# Altium PCB Countinuity_tester.PcbDoc
Units mil, origin at the board's own origin, x right, y up, seen from the top; angles counter-clockwise.
Board outline 1215 x 990 mil, 2 copper layers (Top Layer, Bottom Layer); 11 components, 105 nets, 17 pads, 0 vias.
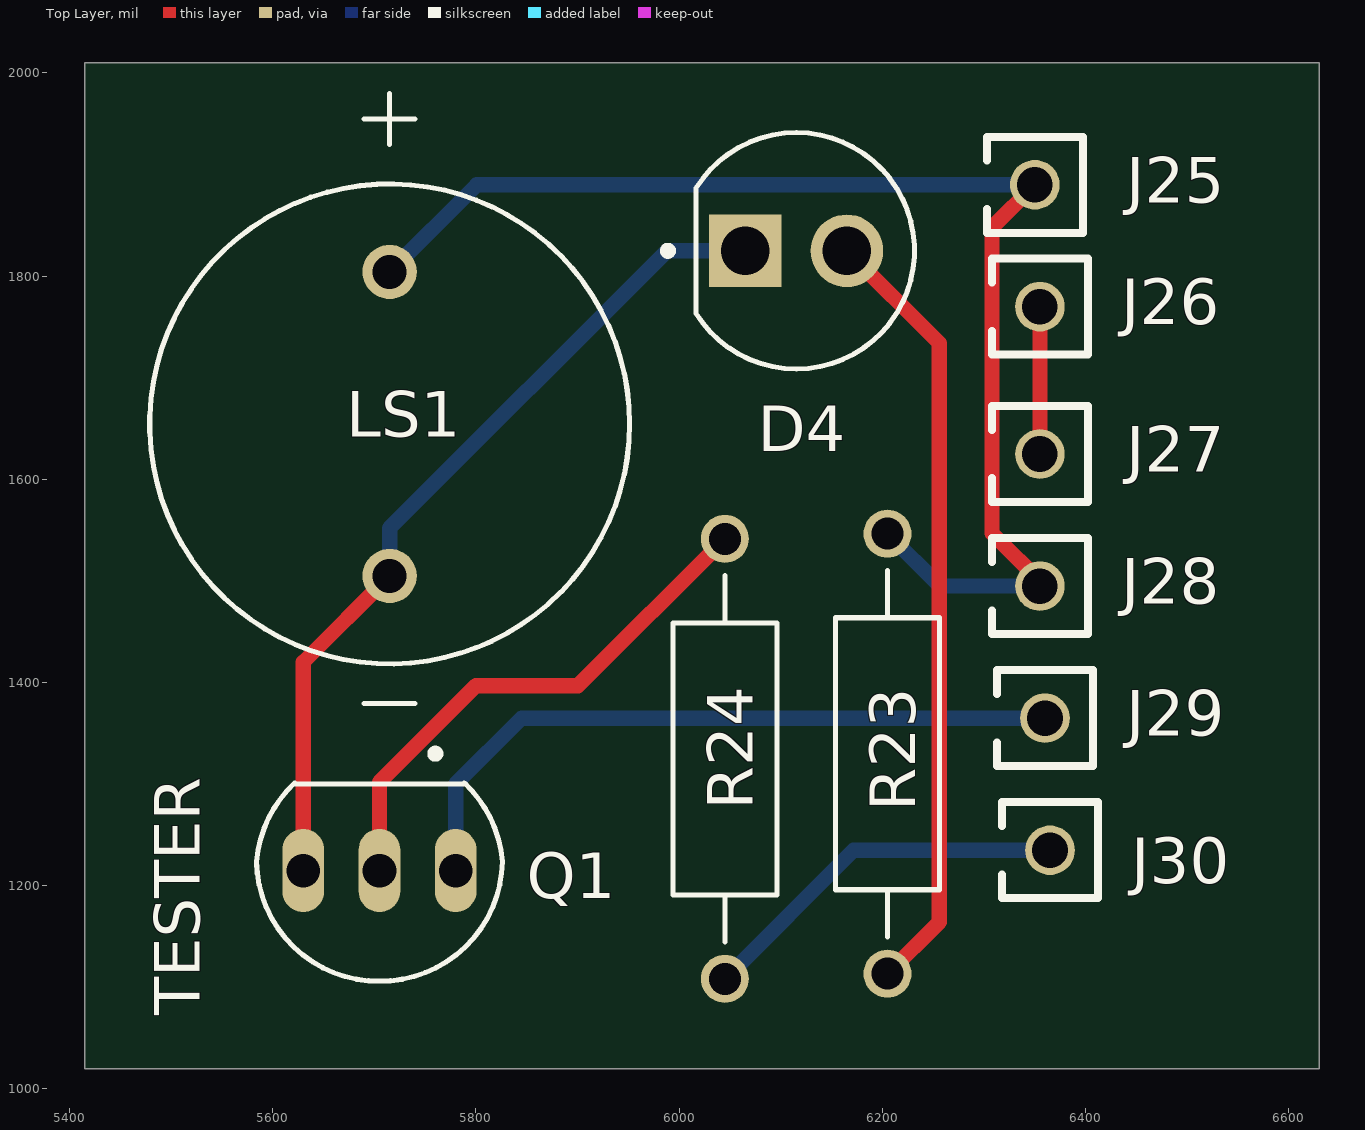
[diagram p0: Top Layer view]
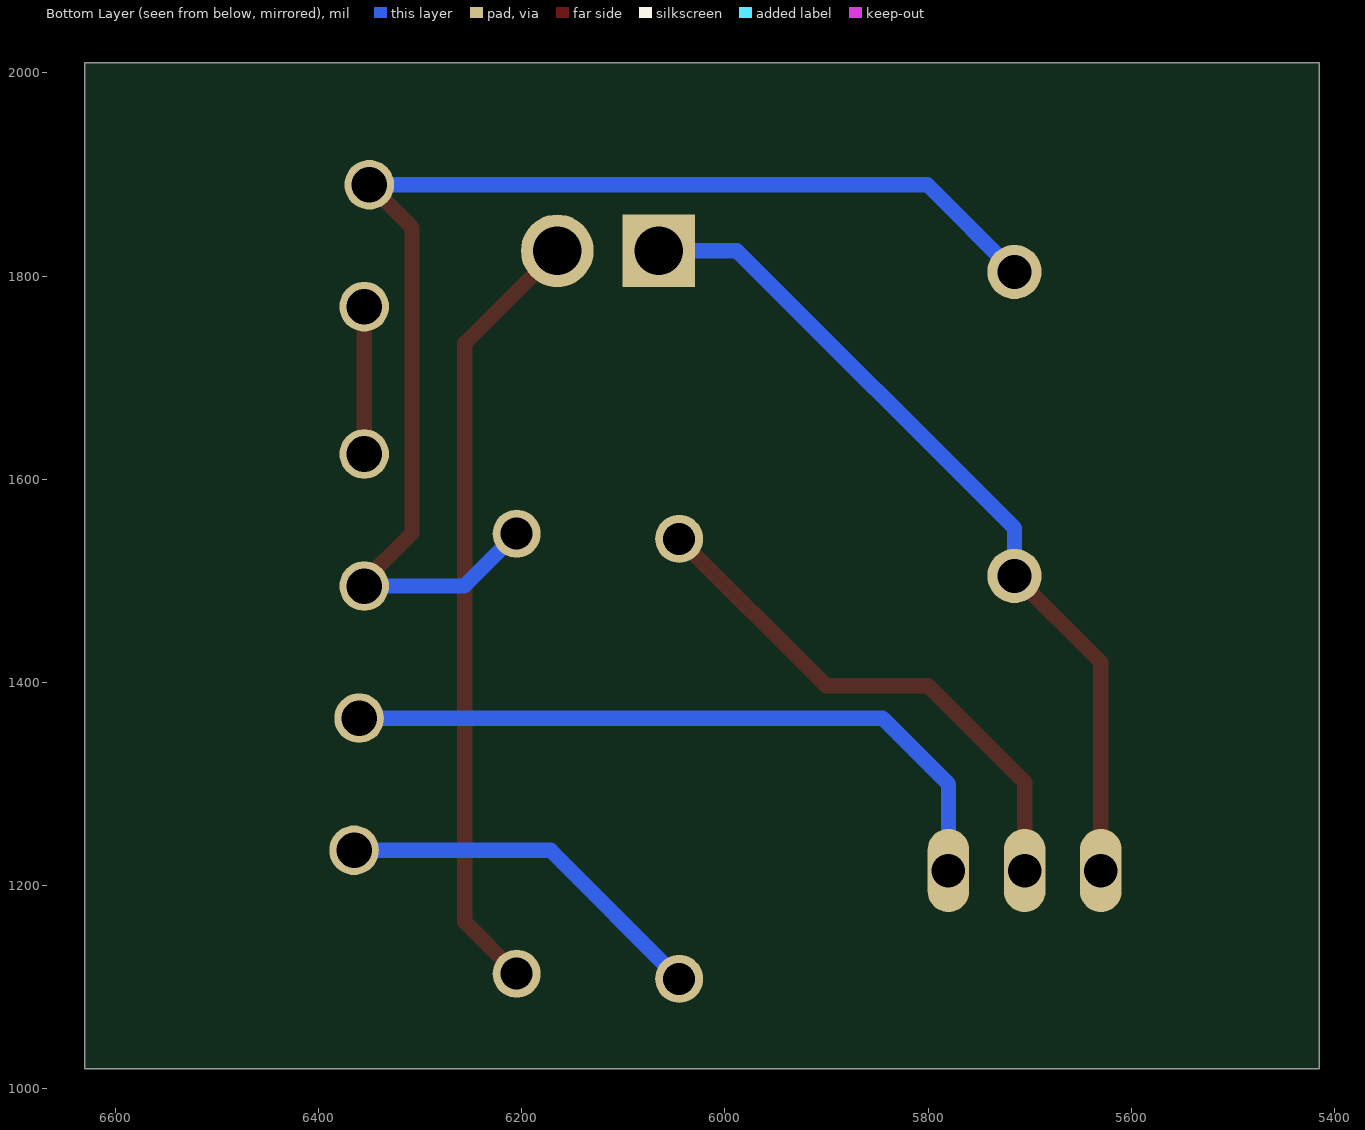
[diagram p1: Bottom Layer view, seen from below]
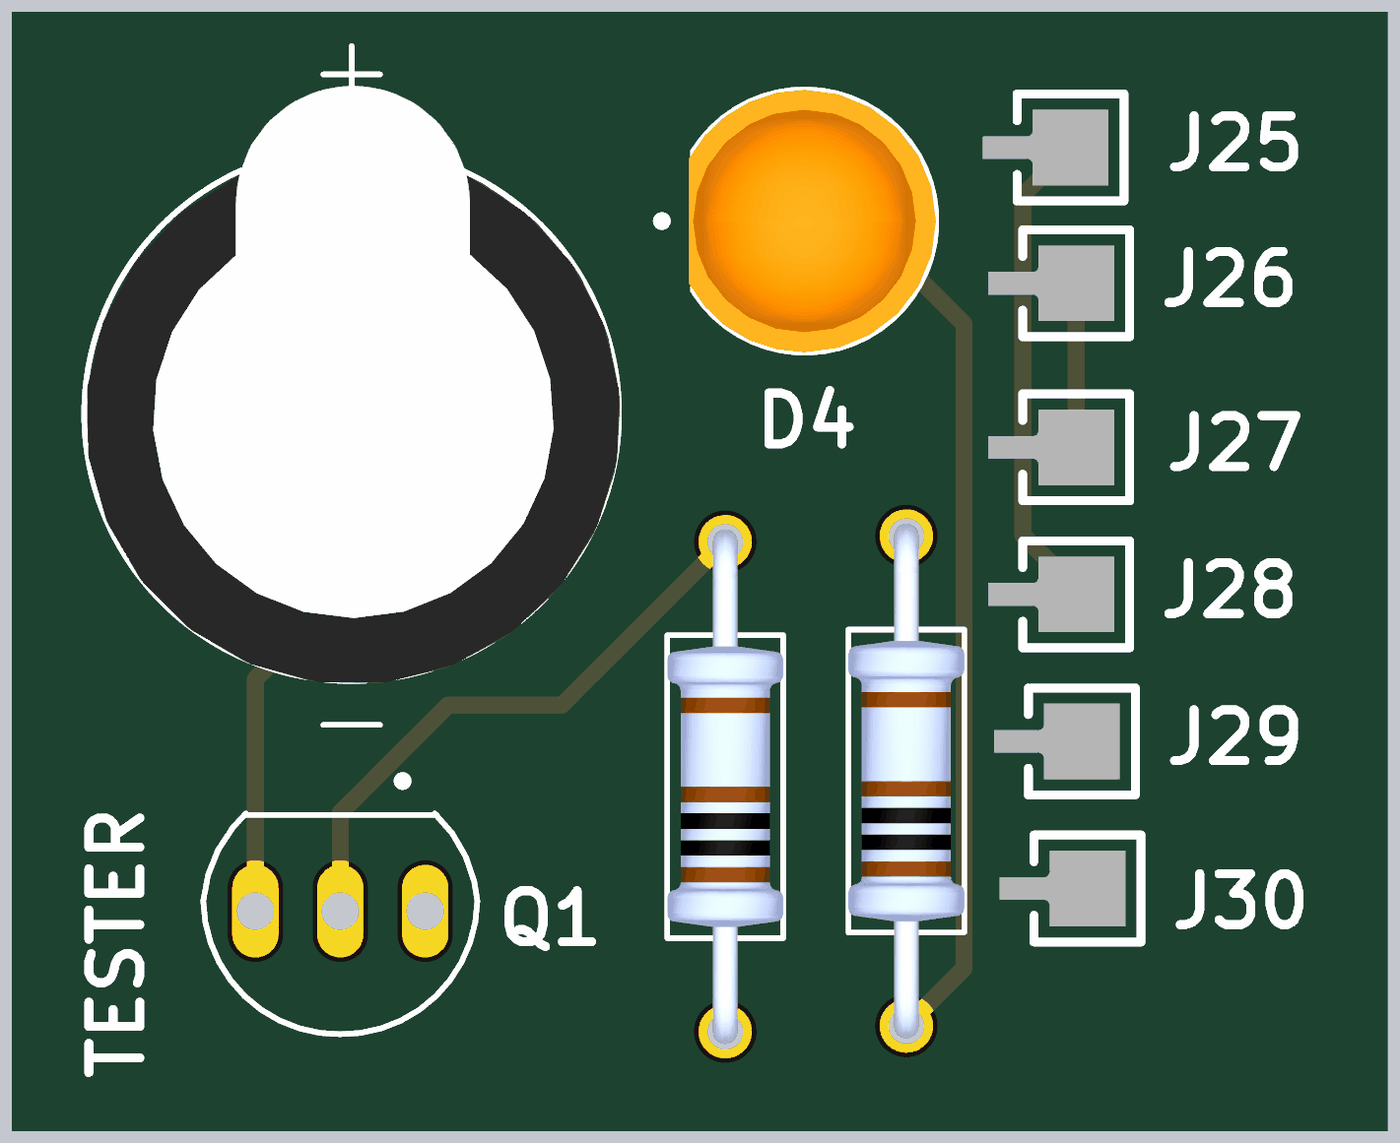
[diagram p2: 3D render of the assembled board from above, using the file's embedded part models]

## Layer stack, top to bottom
Top Solder: solder mask 0.4, Solder Resist, Dk 3.5
Top Layer: signal copper 1.4
Dielectric 1: dielectric 12.6, FR-4, Dk 4.8
Bottom Layer: signal copper 1.4
Bottom Solder: solder mask 0.4, Solder Resist, Dk 3.5

## Board outline
5415,1020 6630,1020 6630,2010 5415,2010

## Design rules (kind name [scope] priority, off if disabled: settings)
Clearance [All] p1: gap=19.68 ignorepadtopadclearanceinfootprint=FALSE except(15: Arc-Arc Arc-Track Arc-SMDPad Arc-THPad Arc-Via Arc-Fill Arc-Poly Arc-Region Arc-Text Track-Track Track-SMDPad Track-THPad Track-Via Track-Fill Track-Poly Track-Region Track-Text; 20: Arc-Hole Track-Hole SMDPad-Hole THPad-Hole Via-Hole Fill-Hole Poly-Hole Region-Hole Text-Hole)
HoleToHoleClearance [All] p1: gap=19.68 allowstackedmicrovias=TRUE
MinimumSolderMaskSliver [All] p1: minsoldermaskwidth=15
PolygonConnect [All] p1: connectstyle=Relief reliefconductorwidth=10 reliefentries=4 polygonreliefangle="90 Angle" airgapwidth=10
RoutingVias [All] p1: holewidth=28 width=50 viastyle="Through Hole" minholewidth=28 minwidth=50 maxholewidth=28 maxwidth=50
SilkToSilkClearance [All] p1: silktosilkclearance=15
SolderMaskExpansion [All] p1: expansion=4 istentingtop=FALSE
Width [All] p1: maxlimit=20 minlimit=10 preferedwidth=15
27 further rules are at their usual default settings.

## Classes and differential pairs
component class Sheet2: C8 C9 R19 U2
component class Sheet1: C1 C2 R8 U1

## Components (designator, comment, footprint, x,y, rotation, side; value= is the part's Value field where it differs from the comment)
D4 "L08R5000Q1" LEDRD254W57D500H1070 6115,1825 r0 top
J25 "P1" SAMTEC_MTMM-101-XX-X-S-XXX 6350,1890 r90 top
J26 "VCC" SAMTEC_MTMM-101-XX-X-S-XXX 6355,1770 r90 top
J27 "SW1" SAMTEC_MTMM-101-XX-X-S-XXX 6355,1625 r90 top
J28 "SW2" SAMTEC_MTMM-101-XX-X-S-XXX 6355,1495 r90 top
J29 "GND" SAMTEC_MTMM-101-XX-X-S-XXX 6360,1365 r90 top
J30 "P2" SAMTEC_MTMM-101-XX-X-S-XXX 6365,1235 r90 top
LS1 "AI-1223-TWT-12V-R" XDCR_AI-1223-TWT-12V-R 5715,1654.61 r0 top
Q1 "2N3904" TO92127P495H495-3 5705,1215 r180 top
R23 "150" RESAD1100W55L680D260 6205,1330 r90 top
R24 "4.7K" RESAD1100W55L680D260 6045,1325 r90 top

## Footprints (in the part's own frame and the unit in brackets; to place one, negate y for a bottom-side part, rotate by r counter-clockwise, add the part's x,y. Pads: shape width x height; smd on the part's side, far side on the other; paste and mask are expansions set on the pad)
LEDRD254W57D500H1070 [mm]
  round 1.815 hole 1.21: A(1.27,0)
  rect 1.815x1.815 / inner round 1.815 / far side rect 1.815x1.815 hole 1.21: C(-1.27,0)
  silkscreen extent -3.3,-2.96 2.96,2.96, body extent -2.6,-2.95 2.95,2.95, height 9.1
RESAD1100W55L680D260 [mm]
  round 1.2 hole 0.8: 1(-5.5,0) 2(5.5,0)
  silkscreen extent -4.58,-1.3 4.58,1.3, body extent -5.77,-1.3 5.77,1.3, height 2.6
SAMTEC_MTMM-101-XX-X-S-XXX [mm]
  round 1.24 hole 0.89: 01(0,0)
  silkscreen extent -1.2,-1.2 1.2,1.2
TO92127P495H495-3 [mm]
  oval 1.04x2.08 hole 0.84: 1(-1.905,0) 2(0,0) 3(1.905,0)
  silkscreen extent -3.08,-3.02 3.08,2.77
XDCR_AI-1223-TWT-12V-R [mm]
  round 1.358 hole 0.85: N(0,-3.8) P(0,3.8)
  silkscreen extent -6,-6.99 6,8.25, body extent -5.97,-6.07 6.03,7.37, height 10.21

## Part data
D4: "LED, 5MM, ORANGE; LED / Lamp Size: 5mm / T-1 3/4; LED Colour: Orange; Typ Luminous Intensity: 4.3mcd; Viewing Angle: ...", Package=None, Availability="In Stock", Check_prices=https://www.snapeda.com/parts/L08R5000Q1/LED+Technology/view-part/?ref=eda, MF="LED Technology", MP=L08R5000Q1, Price=None, SnapEDA_Link=https://www.snapeda.com/parts/L08R5000Q1/LED+Technology/view-part/?ref=snap
J25 J26 J27 J28 J29 J30: library part MTMM-101-XX-X-S-XXX, "Connector Header position", Package=None, Availability=Unavailable, MP=MTMM-101-XX-X-S-XXX, Price=None
LS1: "ELECTRO-MECHANICAL AUDIO INDICATOR", Package=None, Availability="In Stock", Check_prices=https://www.snapeda.com/parts/AI-1223-TWT-12V-R/PUI+Audio%252C+Inc./view-part/?ref=eda, MF="PUI Audio,", MP=AI-1223-TWT-12V-R, Price=None, Purchase-URL=https://pricing.snapeda.com/search/part/AI-1223-TWT-12V-R/?ref=eda, SnapEDA_Link=https://www.snapeda.com/parts/AI-1223-TWT-12V-R/PUI+Audio%252C+Inc./view-part/?ref=snap
Q1: "TRANS NPN 40V 200MA TO92-3", Package="TO-226-3 Rectron", Availability="In Stock", Check_prices=https://www.snapeda.com/parts/2N3904/Rectron/view-part/?ref=eda, MF=Rectron, MP=2N3904, Price=None, Purchase-URL=https://pricing.snapeda.com/search/part/2N3904/?ref=eda, SnapEDA_Link=https://www.snapeda.com/parts/2N3904/Rectron/view-part/?ref=snap
R23 R24: library part MFR-25FBF52-1K, "1.07 kOhms Â±1% 0.25W, 1/4W Through Hole Resistor Axial - Metal Film", Package="Axial Yageo", Availability="In Stock", Check_prices=https://www.snapeda.com/parts/MFR-25FBF52-1K/Yageo/view-part/?ref=eda, MF=Yageo, MP=MFR-25FBF52-1K, Price=None, Purchase-URL=https://pricing.snapeda.com/search/part/MFR-25FBF52-1K/?ref=eda, SnapEDA_Link=https://www.snapeda.com/parts/MFR-25FBF52-1K/Yageo/view-part/?ref=snap

## Nets (pads, with @x,y where several pads share a name; then routed paths per layer and width w, separated by ;. In a path a pad name is that pad's centre, name@x,y a point inside that pad or via, vN(x,y) a via of type N, cw(c..) or ccw(c..) an arc to the next point about the centre after c; other vN are vias at no path point)
+VCC: 
GND: J29.01 Q1.1 | length 691.9
  Bottom Layer w15: Q1.1 5780,1300 5845,1365 J29.01
NetC1_N: 
NetC2_N: 
NetC2_P: 
NetC3_1: 
NetC3_2: 
NetC4_1: 
NetC5_1: 
NetC5_2: 
NetC6_1: 
NetC6_2: 
NetC7_1: 
NetC7_2: 
NetC8_N: 
NetC9_N: 
NetC9_P: 
NetC10_1: 
NetC11_1: 
NetC11_2: 
NetC12_1: 
NetC13_1: 
NetC13_2: 
NetC14_1: 
NetC14_2: 
NetD1_C: 
NetD2_C: 
NetD3_C: 
NetD4_A: D4.A R23.1 | length 770.4
  Top Layer w15: D4.A 6256,1734 6256,1164.46 R23.1
NetD4_C: D4.C LS1.N Q1.3 | length 835.3
  Top Layer w15: Q1.3 5630,1420 LS1.N
  Bottom Layer w15: LS1.N 5715,1552 5988,1825 D4.C
NetIC1_2: 
NetIC1_3: 
NetIC1_4: 
NetIC1_5: 
NetIC1_6: 
NetIC1_7: 
NetIC1_8: 
NetIC1_9: 
NetIC1_10: 
NetIC1_11: 
NetIC1_12: 
NetIC1_13: 
NetIC1_14: 
NetIC1_15: 
NetIC1_16: 
NetIC1_17: 
NetIC1_18: 
NetIC1_19: 
NetIC1_20: 
NetIC1_22: 
NetIC1_23: 
NetIC1_24: 
NetIC1_25: 
NetIC1_28: 
NetIC1_32: 
NetIC1_36: 
NetIC1_39: 
NetIC_2: 
NetIC_3: 
NetIC_4: 
NetIC_5: 
NetIC_6: 
NetIC_7: 
NetIC_8: 
NetIC_9: 
NetIC_10: 
NetIC_11: 
NetIC_12: 
NetIC_13: 
NetIC_14: 
NetIC_15: 
NetIC_16: 
NetIC_17: 
NetIC_18: 
NetIC_19: 
NetIC_20: 
NetIC_22: 
NetIC_23: 
NetIC_24: 
NetIC_25: 
NetIC_28: 
NetIC_36: 
NetIC_39: 
NetJ2_01: 
NetJ6_01: 
NetJ8_01: 
NetJ10_01: 
NetJ11_01: 
NetJ14_01: 
NetJ18_01: 
NetJ20_01: 
NetJ22_01: 
NetJ24_01: 
NetJ26_01: J26.01 J27.01 | length 145
  Top Layer w15: J27.01 J26.01
NetJ30_01: J30.01 R24.1 | length 372.4
  Bottom Layer w15: R24.1 6171.54,1235 J30.01
"NetLED display1_10": 
"NetLED display_3": 
"NetLED display_8": 
"NetLED display_13": 
"NetLED display_15": 
"NetLED display_18": 
NetQ1_2: Q1.2 R24.2 | length 526.2
  Top Layer w15: Q1.2 5705,1302 5800,1397 5900.46,1397 R24.2
NetR8_1: 
NetR16_1: 
VCC: J25.01 J28.01 LS1.P R23.2 | length 1280.8
  Top Layer w15: J25.01 6308,1848 6308,1547 J28.01@6360,1495
  Bottom Layer w15: LS1.P 5800.79,1890 J25.01 ; R23.2 6256.54,1495 J28.01@6360,1495

## Silkscreen, mask and mechanical layers (free items; w line width, h text height)
Top Overlay:
  text "TESTER" at 5527.99,1072.54 h45 r90
Top Component Outline:
  lines w4.92: 5420,1025 6620,1025 6625,1030 6625,2010 5420,2010 5420,1025